# EAGLE board relay_board (EAGLE 6.5.0)
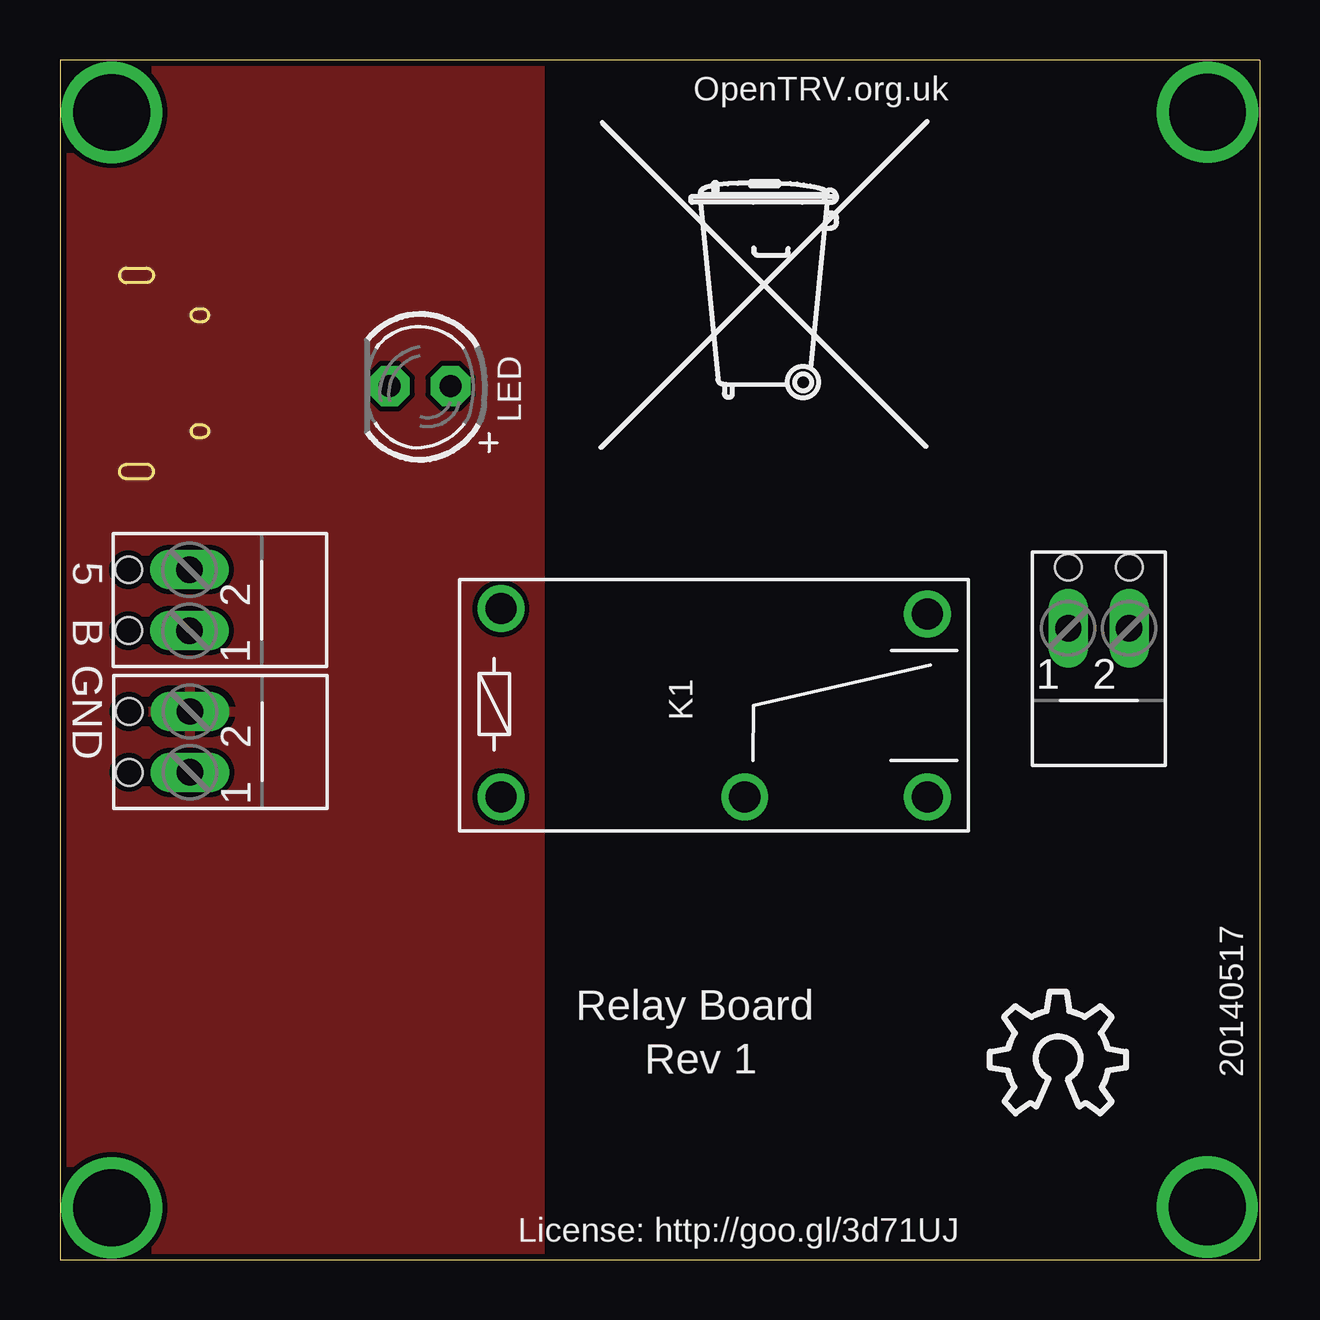
[diagram p0: board, top side]
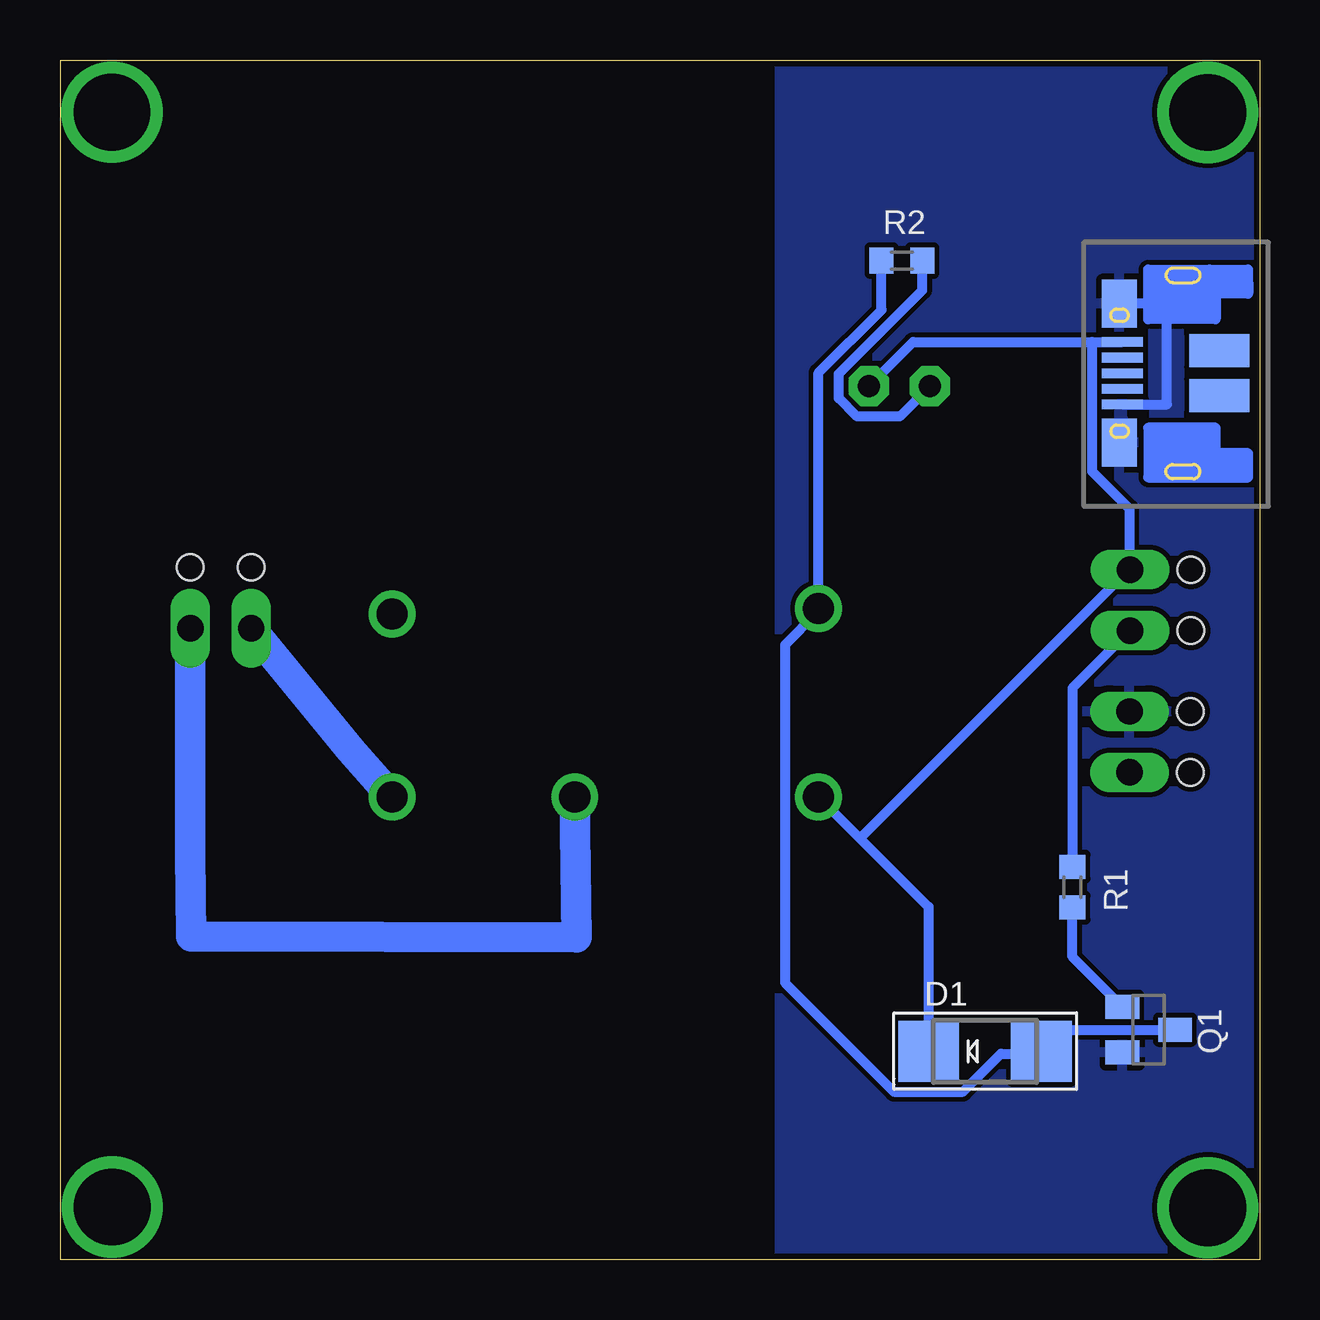
[diagram p1: board, bottom side, seen from below]

Size 50 x 50 mm. Coordinates in mm from the lower left corner, seen from the top.
Outline: 0,0 50,0 50,50 0,50 0,0
Copper layers (1*16): Top 0.035mm / dielectric 1.5mm / Bottom 0.035mm
Design rules "PMServicesStd *": minimum track width 8mil, minimum drill 0.5mm, track to track 8mil, track to pad 8mil, pad to pad 8mil, via to via 8mil, smd to smd 0mil, copper to edge 10mil, drill to drill 10mil, minimum pad ring 10mil, minimum via ring 6mil, stop-mask expansion 2mil, vias tented up to drill 100mil, thermal gap 10mil
Net classes: 0 default: width 0.406 mm; 1 supply: width 0.406 mm, clearance 0.203 mm

## Footprints (pad centres in the part's own frame; a part is rotated, then mirrored left to right if it is on the bottom)
SMADIODE = smd 2.54 x 2.54: A 2.349,0; C -2.349,0
718-1765 = drill 1.3: 11 2.54,-3.81; 12 10.16,3.81; 14 10.16,-3.81; A1 -7.62,-3.81; A2 -7.62,4.04
LED3MM = drill 0.914 pad 1.676 octagon: A -1.27,0; K 1.27,0
SOT23 = smd 1 x 1.4: 1 -0.95,-1.1; 2 0.95,-1.1; 3 0,1.1
R0603 = smd 1 x 1.1: 1 -0.85,0; 2 0.85,0
MICRO-USB-FCI-10103592 = smd 0.4 x 1.71: 1 3.84,2.51; 2 3.19,2.51; 3 2.54,2.51; 4 1.89,2.51; 5 1.24,2.51 | smd 2 x 1.46: 7 -0.36,2.64; 17 5.44,2.64 | smd 1.375 x 2.5: 11 1.603,-1.52; 12 3.478,-1.52
SCREWTERMINAL = drill 1.1 long: 1 -1.27,-1.27; 2 1.27,-1.27 | hole 1.1: -1.27,1.27; 1.27,1.27

## Placement (x,y rotation side)
D1  [SMADIODE]  11.44,8.68 0 bottom
K1  718-1765  [718-1765]  26,23.1 0 top
LED  [LED3MM]  15.01,36.4 180 top
Q1  MMBT3904  [SOT23]  4.62,9.58 270 bottom
R1  1K  [R0603]  7.8,15.52 270 bottom
R2  470R  [R0603]  14.91,41.64 0 bottom
U$1  [OSHW_10X200_NOTEXT]  38.76,6.09 0 top
U$2  [TONNE]  29.2,37.89 0 top
USBPOWER  MICRO-USB-FCI-10103592  [MICRO-USB-FCI-10103592]  3.2,34.4 90 bottom
X1  [SCREWTERMINAL]  4.13,27.48 90 top
X2  [SCREWTERMINAL]  4.15,21.57 90 top
X3  [SCREWTERMINAL]  43.3,27.58 0 top

## Library data of the parts
D1 LED = adafruit
K1 = flatpackrelay; OC_FARNELL: unknown; OC_NEWARK: unknown
Q1 = semicon-smd-ipc
R1 R2 = resistor
U$1 = ohw-logo
U$2 = logo
USBPOWER = micro-usb-fci-10103592
X1-X3 = screwterminal; MPN: 237-102; OC_FARNELL: unknown; OC_NEWARK: 70K9898

## Nets
5V [supply]: D1.C K1.A1 LED.A USBPOWER.1 X1.2
BOILER: R1.1 X1.1
GND [supply]: Q1.2 USBPOWER.5 USBPOWER.7 USBPOWER.17 X2.2
N$1: K1.14 X3.1
N$3: D1.A K1.A2 Q1.3 R2.1
N$5: K1.11 X3.2
N$6: Q1.1 R1.2
N$13: LED.K R2.2

## Tracks (layer width: path | path; a pad name or v marks a point on that pad's centre or on a via)
5V
  Bottom 0.406: 16.66,17.56 K1.A1 | 16.66,17.56 13.8,14.7 13.8,8.7 D1.C | 6.98,38.24 14.44,38.24 16.26,36.42 LED.A | 6.98,38.24 USBPOWER.1 | 6.98,38.24 6.98,32.86 5.42,31.3 5.42,28.76 X1.2 5.58,28.64 16.66,17.56
BOILER
  Bottom 0.406: R1.1 7.8,23.82 5.42,26.2 X1.1
GND
  Bottom 0.406: USBPOWER.5 3.86,35.64 3.86,39.84 USBPOWER.17
  pour Bottom: 20,50 0,50 0,0 20,0
  pour Top: 20,50 0,50 0,0 20,0
N$1
  Bottom 1.27: K1.14 37.89,21.24 X3.1
N$3
  Bottom 0.406: Q1.3 8.2,9.58 9.08,8.7 D1.A 9.28,8.58 10.78,8.58 12.36,7 15.24,7 19.78,11.54 19.78,25.62 18.46,26.94 K1.A2 18.38,36.96 15.76,39.58 15.76,41.62 R2.1
N$4  (via drill 3.2)
  other vias: 2.16,47.81
N$5
  Bottom 1.27: K1.11 28.46,13.43 44.54,13.47 44.57,16.9 X3.2
N$6
  Bottom 0.406: R1.2 7.8,12.62 Q1.1
N$12  (via drill 3.2)
  other vias: 47.83,2.19
N$13
  Bottom 0.406: R2.2 14.06,41.62 14.06,40.4 17.54,36.92 17.54,35.9 16.78,35.14 15,35.14 LED.K
N$19  (via drill 3.2)
  other vias: 47.83,47.82
N$22  (via drill 3.2)
  other vias: 2.16,2.16

## Text on the board
tPlace: License: http://goo.gl/3d71UJ
tNames: OpenTRV.org.uk | 5 | B | GND | 20140517 | Relay Board | Rev 1